# Altium PCB Pressure_Tap_Board.PcbDoc (part 2 of 2)
Units mil, origin at the board's own origin, x right, y up, seen from the top; angles counter-clockwise.
Board outline 8600 x 2865 mil, 2 copper layers (Top Layer, Bottom Layer); 161 components, 82 nets, 571 pads, 255 vias.
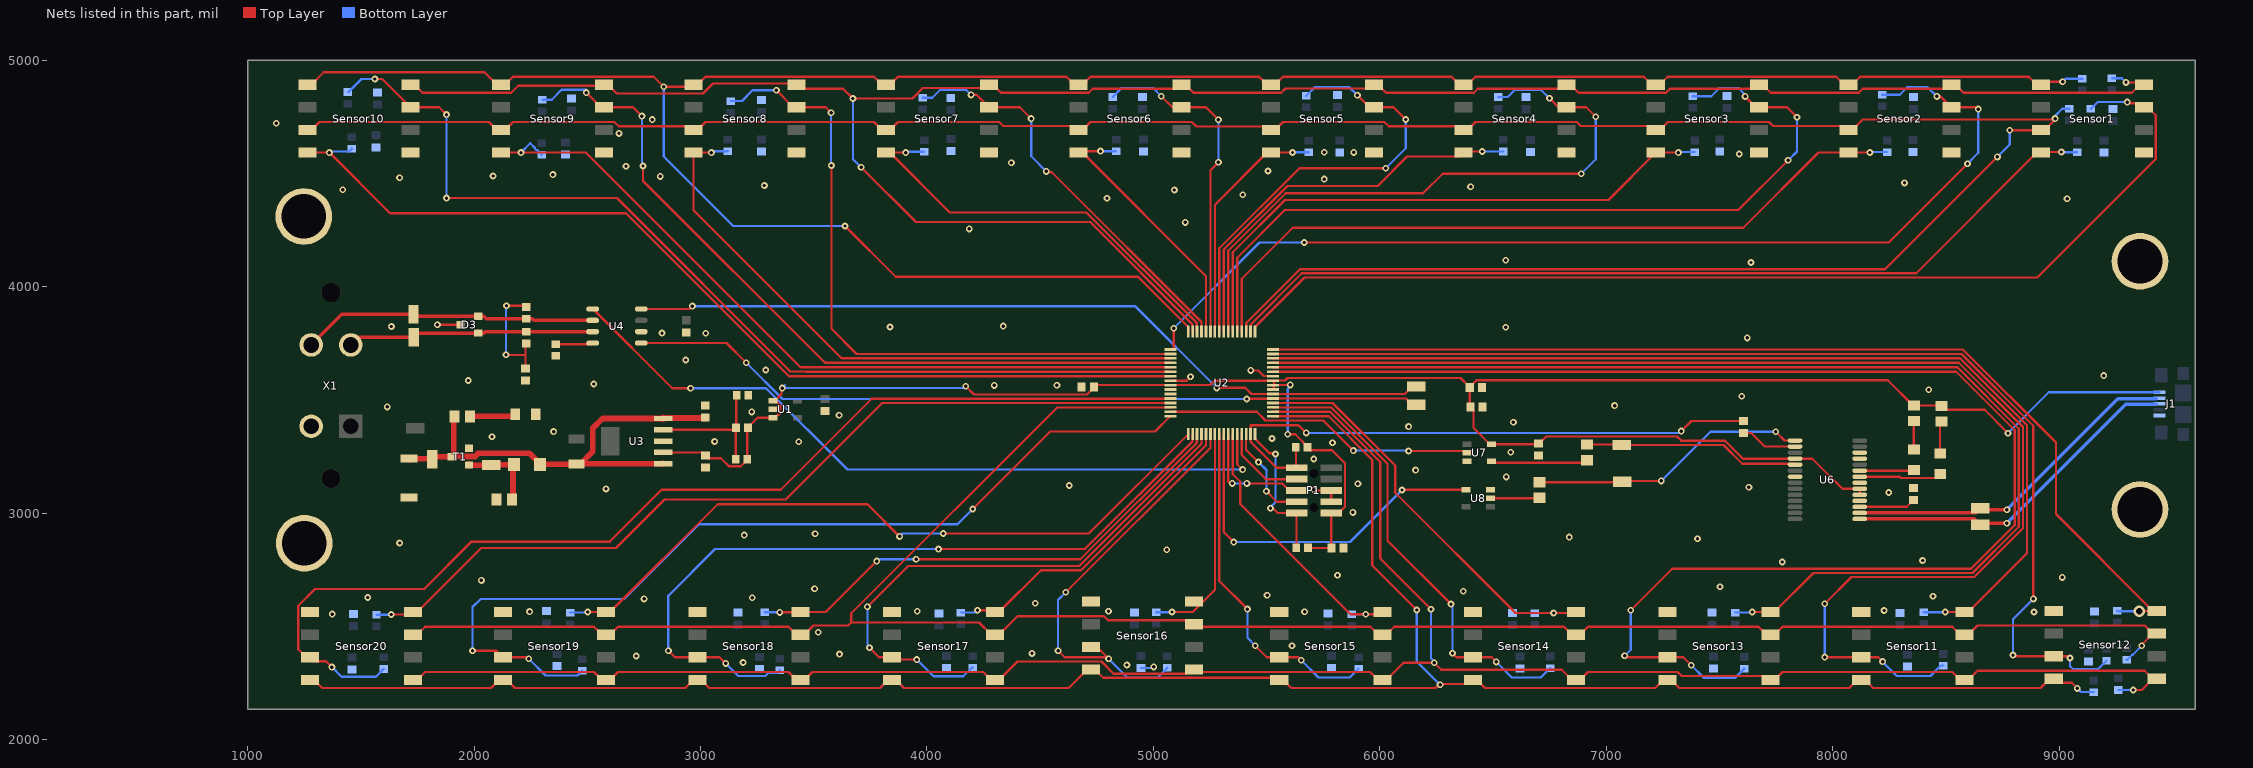
[diagram p2: the nets of this part, all layers, seen from the top]

## Via types
v1: diameter 30, hole 15, Top Layer to Bottom Layer, 254 vias
v2: diameter 50, hole 28, Top Layer to Bottom Layer, 1 vias

## Nets (pads, with @x,y where several pads share a name; then routed paths per layer and width w, separated by ;. In a path a pad name is that pad's centre, name@x,y a point inside that pad or via, vN(x,y) a via of type N, cw(c..) or ccw(c..) an arc to the next point about the centre after c; other vN are vias at no path point) (continued)
ADC1: R9.1 Sensor1.4 U2.18 | length 3997.7
  Top Layer w10: U2.18@5428.95,3802.38 5429.73,3803.16 5429.73,3834.34 5655.24,4059.84 8368.26,4059.84 8901.42,4593 Sensor1.4@8918.92,4593 8921.77,4595.85 v1(9010,4595.85)
  Bottom Layer w10: v1(9010,4595.85) 9011.85,4594 R9.1@9079,4594
ADC2: R42.1 Sensor2.4 U2.20 | length 3315.5
  Top Layer w10: U2.20@5389.58,3802.38 5389.58,4035.58 5615,4261 7605,4261 7937,4593 Sensor2.4@8068.92,4593 8163.57,4593 v1(8164,4593.43)
  Bottom Layer w10: v1(8164,4593.43) 8165.98,4595.41 R42.1@8240,4595.41
ADC3: R44.1 Sensor3.4 U2.22 | length 2574.8
  Top Layer w10: U2.22@5350.21,3802.38 5350.21,4153.21 5581,4384 7009.45,4384 Sensor3.4@7218.45,4593 v1(7318.59,4593)
  Bottom Layer w10: v1(7318.59,4593) 7321,4595.41 R44.1@7391,4595.41
ADC4: R46.1 Sensor4.4 U2.24 | length 1776.1
  Top Layer w10: U2.24@5310.84,3802.38 5310.84,4164.75 5591.93,4445.84 5990.27,4445.84 6119.93,4575.5 6351.42,4575.5 6373.92,4598 v1(6452,4598)
  Bottom Layer w10: v1(6452,4598) 6544.82,4598 R46.1@6545,4597.82
ADC5: R48.1 Sensor5.4 U2.26 | length 1073.9
  Top Layer w10: U2.26@5272.25,3801 5271.47,3801.78 5271.47,4363.05 5501.42,4593 Sensor5.4@5518.92,4593 5519.35,4593.43 v1(5614,4593.43)
  Bottom Layer w10: v1(5614,4593.43) 5615.39,4594.82 R48.1@5687,4594.82
ADC6: R51.1 Sensor6.4 U2.28 | length 1202.9
  Top Layer w10: v1(4766.41,4599.41) 4675.33,4599.41 Sensor6.4@4668.92,4593 4686.42,4593 5232.1,4047.32 U2.28@5232.1,3802.38
  Bottom Layer w10: v1(4766.41,4599.41) R51.1@4835,4599.41
ADC7: R52.1 Sensor7.4 U2.30 | length 1874.9
  Top Layer w10: Sensor7.4@3818.92,4593 Sensor7.4@3836.42,4593 ; v1(3906,4593) Sensor7.4@3836.42,4593 ; U2.30@5192.73,3802.38 5191.95,3803.16 5191.95,3840.11 4703.22,4328.84 4100.58,4328.84 Sensor7.4@3836.42,4593
  Bottom Layer w10: v1(3906,4593) 3909.41,4596.41 R52.1@3987,4596.41
ADC8: R55.1 Sensor8.4 U2.35 | length 2786.2
  Top Layer w10: v1(3048,4593) Sensor8.4@2968.92,4593 2968.92,4338.08 3622.73,3684.27 U2.35@5074.62,3684.27
  Bottom Layer w10: v1(3048,4593) 3054.41,4599.41 R55.1@3121,4599.41
ADC9: R56.1 Sensor9.4 U2.37 | length 3480.1
  Top Layer w10: Sensor9.4@2118.92,4593 v1(2207,4593) 2493,4593 3441.1,3644.9 U2.37@5074.62,3644.9
  Bottom Layer w10: v1(2207,4593) 2248.2,4634.2 2267.3,4615.11 2267.3,4612.47 2274.91,4604.86 2277.55,4604.86 R56.1@2299,4583.41
ADC10: R58.1 Sensor10.4 U2.39 | length 4325.5
  Top Layer w10: Sensor10.4@1263.92,4593 v1(1361,4593) 1629,4325 2671.02,4325 3390.5,3605.53 3437,3605.53 U2.39@5074.62,3605.53
  Bottom Layer w10: v1(1361,4593) 1366.41,4593 1371.09,4597.68 1448.27,4597.68 R58.1@1460,4609.41
ADC11: R20.1 Sensor11.4 U2.14 | length 4583
  Top Layer w10: U2.14@5527.38,3684.27 8562.53,3684.27 8858,3388.79 8858,2823.42 8598.58,2564 v1(8497,2564)
  Bottom Layer w10: R20.1@8401,2563.59 8496.59,2563.59 v1(8497,2564)
ADC12: R12.1 Sensor12.4 U2.16 | length 4725.8
  Top Layer w10: U2.16@5527.38,3723.64 8574.07,3723.64 8985.46,3312.24 8985.46,2997.12 Sensor12.4@9413.58,2569 ; v2(9353,2567.84) 9354.16,2569 Sensor12.4@9413.58,2569 ; Sensor12.4@9431.08,2569 Sensor12.4@9413.58,2569
  Bottom Layer w10: R12.1@9256,2570.59 9258.75,2567.84 v2(9353,2567.84)
ADC13: R25.1 Sensor13.4 U2.12 | length 5249.8
  Top Layer w10: U2.12@5527.38,3644.9 8550.98,3644.9 8822,3373.88 8822,2941.12 8617.72,2736.84 7915.02,2736.84 7742.18,2564 v1(7644.43,2564)
  Bottom Layer w10: R25.1@7569,2561.59 7642.02,2561.59 v1(7644.43,2564)
ADC14: R30.1 Sensor14.4 U2.4 | length 1871.4
  Top Layer w10: U2.4@5527.38,3487.42 5791.38,3487.42 6068,3210.79 6068,3090.57 6598.98,2559.59 Sensor14.4@6861.59,2559.59
  Bottom Layer w10: R30.1@6685,2559.59 v1(6767.41,2559.59)
ADC15: R27.1 Sensor15.4 U2.59 | length 1216.5
  Top Layer w10: U2.59@5350.21,3349.62 5350.21,3172.21 5383,3139.43 5383,3041.59 5870,2554.59 v1(5937.59,2554.59) ; v1@5939.79,2556.79 5941.98,2554.59 6001.59,2554.59 Sensor15.4@6011,2564
  Bottom Layer w10: R27.1@5875,2554.59 v1(5937.59,2554.59)
ADC16: R34.1 Sensor16.4 U2.55 | length 988.3
  Top Layer w10: v1(5082,2564) 5173.5,2564 5271.47,2661.97 U2.55@5271.47,3349.62
  Bottom Layer w10: R34.1@5012,2562.59 5080.59,2562.59 v1(5082,2564)
ADC17: R31.1 Sensor17.4 U2.53 | length 1448.7
  Top Layer w10: v1(4223,2572.35) 4310.15,2572.35 4318.5,2564 4503.5,2749 4679.97,2749 5232.1,3301.13 U2.53@5232.1,3349.62
  Bottom Layer w10: R31.1@4150,2561.59 4220.59,2561.59 4223,2564 v1(4223,2572.35)
ADC18: R38.1 Sensor18.4 U2.51 | length 2257.4
  Top Layer w10: v1(3349.41,2562.59) 3439.59,2562.59 Sensor18.4@3441,2564 3553,2564 v1(3778,2789) ; v1(3952,2797) 4677.06,2797 5191.95,3311.89 5191.95,3348.84 U2.51@5192.73,3349.62
  Bottom Layer w10: R38.1@3283,2562.59 v1(3349.41,2562.59) ; v1(3778,2789) 3786,2797 v1(3952,2797)
ADC19: R35.1 Sensor19.4 U2.49 | length 3172.4
  Top Layer w10: v1(2502,2564) Sensor19.4@2582.57,2564 2600.07,2564 3076.07,3040 3737,3040 v1(3879,2898) ; v1(4072,2911) 4714.74,2911 U2.49@5153.36,3349.62
  Bottom Layer w10: R35.1@2425,2561.59 2499.59,2561.59 v1(2502,2564) ; v1(3879,2898) 3892,2911 v1(4072,2911)
ADC20: R39.1 Sensor20.4 U2.45 | length 3892.8
  Top Layer w10: v1(1634,2553) 1720,2553 Sensor20.4@1731,2564 1748.5,2564 2031.5,2847 2627,2847 2841,3061 3376.58,3061 3803,3487.42 U2.45@5074.62,3487.42
  Bottom Layer w10: R39.1@1569,2552.59 1633.59,2552.59 v1(1634,2553)
CAN_N: D3.2 R16.1 TEST_CANN1.1 U4.6 X1.3 | length 1310.7
  Top Layer w15: X1.3@1280.32,3743.45 1415.87,3879 TEST_CANN1.1@1732,3879 1740.6,3870.4 D3.2@2018.37,3870.4 2043.59,3870.4 2053.99,3860 R16.1@2230,3860 2256.2,3860 2264.2,3852 U4.6@2523.72,3852
CAN_P: D3.1 R17.2 TEST_CANP1.1 U4.7 X1.4 | length 1092.4
  Top Layer w15: X1.4@1455.52,3743.45 1490.07,3778 TEST_CANP1.1@1733,3778 1750.6,3795.6 D3.1@2018.37,3795.6 2043.59,3795.6 2048.99,3801 R17.2@2230,3801 2256.2,3801 2257.2,3802 U4.7@2523.72,3802
Clk1-10: R7.1 Sensor1.1 Sensor2.1 Sensor3.1 Sensor4.1 Sensor5.1 Sensor6.1 Sensor7.1 Sensor8.1 Sensor9.1 Sensor10.1 U2.32 | length 11092.9
  Top Layer w10: Sensor10.1@1263.92,4893 1281.42,4893 1336.42,4948 2046.42,4948 2101.42,4893 2136.42,4893 2171.92,4928.5 2793.5,4928.5 v1(2838,4884) 2959.92,4884 Sensor8.1@2968.92,4893 2986.42,4893 3021.92,4928.5 3765.92,4928.5 3801.42,4893 3836.42,4893 3871.92,4928.5 4615.92,4928.5 4651.42,4893 4686.42,4893 4721.92,4928.5 5465.92,4928.5 5501.42,4893 5536.42,4893 5571.92,4928.5 6315.92,4928.5 6351.42,4893 6386.42,4893 6421.92,4928.5 7165.45,4928.5 7200.95,4893 7235.95,4893 7271.45,4928.5 8015.92,4928.5 8051.42,4893 8086.42,4893 8121.92,4928.5 8865.92,4928.5 8901.42,4893 Sensor1.1@8918.92,4893 8931.92,4906 v1(9015,4906) ; v1(3638,4269) 3862.44,4044.56 4931.85,4044.56 5153.36,3823.05 U2.32@5153.36,3802.38
  Bottom Layer w10: v1(2838,4884) 2838,4576 3145,4269 v1(3638,4269) ; v1(9015,4906) 9027.59,4918.59 R7.1@9102,4918.59
Clk11-20: R10.1 Sensor11.1 Sensor12.1 Sensor13.1 Sensor14.1 Sensor15.1 Sensor16.1 Sensor17.1 Sensor18.1 Sensor19.1 Sensor20.1 U2.2 | length 9714.8
  Top Layer w10: Sensor20.1@1731,2264 1748.5,2264 1784,2299.5 2529.57,2299.5 2565.07,2264 2600.07,2264 2635.57,2299.5 3388,2299.5 3423.5,2264 3458.5,2264 3494,2299.5 4248,2299.5 4283.5,2264 4318.5,2264 4400,2345.5 4770.31,2345.5 4823.96,2291.84 5144.34,2291.84 5162.5,2310 Sensor16.1@5180,2310 ; Sensor16.1@5209,2299.5 5958,2299.5 5993.5,2264 6028.5,2264 6104.5,2340 v1(6240,2340) 6271.16,2308.84 6803.66,2308.84 6848.5,2264 6883.5,2264 6919,2299.5 7314.98,2299.5 7332.98,2281.5 7707.18,2281.5 Sensor13.1@7724.68,2264 7742.18,2264 7777.68,2299.5 8528.08,2299.5 8563.58,2264 8598.58,2264 8639.08,2304.5 9378.08,2304.5 Sensor12.1@9413.58,2269 ; U2.2@5527.38,3448.05 5779.84,3448.05 6001.39,3226.49 6001.39,2800.61 v1(6226,2576) ; v1(9326.82,2219.82) 9364.4,2219.82 Sensor12.1@9413.58,2269 ; Sensor12.1@9431.08,2269 Sensor12.1@9413.58,2269
  Bottom Layer w10: v1(6226,2576) 6226,2359.41 6240,2345.41 v1(6240,2340) ; R10.1@9261,2219.82 v1(9326.82,2219.82)
D_N: J1.2 TEST_USBD_N1.1 U6.16 | length 1524
  Top Layer w15: U6.16@8119,3001.93 8630.93,3001.93 TEST_USBD_N1.1@8651,3022 8657,3016 v1(8769,3016)
  Bottom Layer w15: v1(8769,3016) 9259.62,3506.62 J1.2@9429,3506.62
D_P: J1.3 TEST_USBD_P1.1 U6.15 | length 1540.4
  Top Layer w15: U6.15@8119,2975.31 8625.69,2975.31 TEST_USBD_P1.1@8651,2950 8657,2956 v1(8769,2956)
  Bottom Layer w15: v1(8769,2956) 9294.03,3481.03 J1.3@9429,3481.03
DGND: C1.1 C2.1 C3.1 C5.1 C6.1 C7.1 C8.1 C9.1 C10.1 C11.1 C12.2 C13.1 C14.1 C15.1 C16.1 C18.1 C19.1 C20.1 C21.1 C22.1 C23.1 C24.1 C25.1 C26.1 C27.1 C28.1 C29.1 C30.1 C31.1 C32.1 C33.1 C34.1 C35.1 C36.1 C37.1 C38.1 C39.1 C40.1 C41.1 C42.1 C43.1 C44.1 C45.1 C46.1 C47.1 C48.1 C49.1 C50.1 C51.1 C52.1 C53.1 D2.1 D3.3 J1.5 P1.3 P1.5 pad.4 pad.5 pad.7 pad.8 pad.9 pad.10 POWER1.2 R2.1 R5.1@2098.55,3060 R15.2 Sensor1.5 Sensor2.5 Sensor3.5 Sensor4.5 Sensor5.5 Sensor6.5 Sensor7.5 Sensor8.5 Sensor9.5 Sensor10.5 Sensor11.5 Sensor12.5 Sensor13.5 Sensor14.5 Sensor15.5 Sensor16.5 Sensor17.5 Sensor18.5 Sensor19.5 Sensor20.5 T1.2 U1.2 U2.10 U2.40 U3.3 U4.2 U6.7 U6.18 U6.21 U6.25 U6.26 U7.3 U8.3 X1.2 | length 483.6
  Top Layer w10: v1(1838,3833) D3.3@1939.63,3833 ; U2.40@5074.62,3585.84 5146.84,3585.84 v1(5164,3603) ; v1(5429.73,3631) 5463.11,3631 5487.8,3606.31 U2.10@5517.79,3606.31 ; v1(5707.84,3103.84) 5710.69,3101 P1.5@5785.77,3101 P1.3@5785.77,3051
  Bottom Layer w10: C28.1@4946,2316.43 4996.43,2316.43 v1(5001.84,2321.84)
  other v1: 4882.84,2329.99 3188,2341 2715.84,2369.84 3613.84,2378.39 4463.84,2381.35 5611.84,2414.84 3519.51,2474.84 1374,2555 8889,2564 5667.84,2564.84 2245.06,2565.84 3956.84,2567.84 4801.84,2567.84 8226.84,2570.84 4477.84,2602.51 2750.84,2621.84 3228,2627 1530,2628 8442.84,2633.84 5502.14,2637.71 6368,2656 3503.84,2666.84 7502,2676 2032.34,2703.84 9014,2717 5812.84,2726.84 7776.84,2784.84 8396.84,2791.84 5059,2839 1671,2869 7402.84,2887.84 6836.84,2894.84 3192.84,2903.84 3505.84,2909.84 5880.84,3003.84 8247,3092 2582.57,3108 7629.84,3114.84 4628,3123 5902.84,3130.84 6557.84,3160.84 6157.84,3190.84 5707.84,3239.84 6577.84,3269.84 5790.84,3311.84 3434,3316 3062,3317 5523.84,3330.53 2079,3338 2351,3361 6127,3383 6589.84,3401.84 3612,3433 3225.84,3447.84 1616.84,3469.84 7036.84,3475.84 7597.84,3516.84 8424,3546 4296.84,3564.84 4573.84,3565.84 2528.84,3570.87 1973.84,3586.69 9197,3608 3287.69,3632.84 2934.84,3677.29 7622.84,3774.84 3022.84,3794.84 2829.84,3795.69 6555.84,3821.84 3836.84,3822.84 1634.87,3825 4336.84,3826.84 7638.84,4107.84 6555.84,4117.84 4187,4256 5140.84,4284.84 9035,4389 4794.84,4391.84 5394.84,4406.84 5092.84,4427.84 1419.84,4428.84 6400.84,4441.84 3281.84,4447.55 8317,4459 5754.84,4475.84 1670.84,4481.84 2821.84,4487.84 2083.84,4489.84 2347.84,4495.84 5505.84,4511.84 2670.84,4532.84 4372.84,4547.84 7587,4587 5884.84,4593.84 5754,4594.75 2639.84,4677.84 1125.84,4722.84 2786.84,4738.84
Din1-10: R8.1 Sensor1.3 Sensor2.3 Sensor3.3 Sensor4.3 Sensor5.3 Sensor6.3 Sensor7.3 Sensor8.3 Sensor9.3 Sensor10.3 U2.19 | length 12066.9
  Top Layer w10: Sensor10.3@1263.92,4693 1281.42,4693 1316.92,4728.5 2065.92,4728.5 2101.42,4693 2136.42,4693 2171.92,4728.5 2619.38,4728.5 2639.04,4708.84 2953.08,4708.84 Sensor8.3@2968.92,4693 2986.42,4693 3021.92,4728.5 3765.92,4728.5 3801.42,4693 3836.42,4693 3871.92,4728.5 4319.38,4728.5 4337.38,4710.5 4651.42,4710.5 Sensor6.3@4668.92,4693 4686.42,4693 4721.92,4728.5 5169.38,4728.5 5189.88,4708 5503.92,4708 Sensor5.3@5518.92,4693 5536.42,4693 5571.92,4728.5 6019.38,4728.5 6038.88,4709 6352.92,4709 Sensor4.3@6368.92,4693 6386.42,4693 6421.92,4728.5 6869.38,4728.5 6887.38,4710.5 7200.95,4710.5 Sensor3.3@7218.45,4693 7235.95,4693 7271.45,4728.5 7718.91,4728.5 7736.91,4710.5 8051.42,4710.5 Sensor2.3@8068.92,4693 8086.42,4693 8132.42,4739 8964.92,4739 ; U2.19@5409.27,3802.38 5410.05,3803.16 5410.05,3840.11 5647.78,4077.84 8230.84,4077.84 v1(8727,4574) ; v1(8782,4692) 8917.92,4692 Sensor1.3@8918.92,4693 8936.42,4693 8982,4738.58 v1(8982,4743)
  Bottom Layer w10: v1(8727,4574) 8782,4629 v1(8782,4692) ; v1(8982,4743) 8982,4755 9013.59,4786.59 R8.1@9045,4786.59
Din11-20: R11.1 Sensor11.3 Sensor12.3 Sensor13.3 Sensor14.3 Sensor15.3 Sensor16.3 Sensor17.3 Sensor18.3 Sensor19.3 Sensor20.3 U2.46 | length 9999.7
  Top Layer w10: Sensor20.3@1731,2464 1748.5,2464 1784,2499.5 2529.57,2499.5 2565.07,2464 2600.07,2464 2635.57,2499.5 3388,2499.5 3423.5,2464 3458.5,2464 3499.34,2504.84 3652.84,2504.84 3666,2518 ; U2.46@5074.62,3467.73 4575.31,3467.73 3666,2558.43 3666,2518 ; v1(9365,2415) 9368.83,2418.83 9368.83,2424.25 Sensor12.3@9413.58,2469 ; 3666,2518 4229.5,2518 4283.5,2464 4318.5,2464 4400,2545.5 4781.76,2545.5 4799.26,2528 4825.46,2528 4825.96,2527.5 5181,2527.5 5209,2499.5 5958,2499.5 5993.5,2464 6028.5,2464 6064,2499.5 6813,2499.5 6848.5,2464 6883.5,2464 6919,2499.5 7671.68,2499.5 7707.18,2464 7742.18,2464 7777.68,2499.5 8528.08,2499.5 8563.58,2464 8598.58,2464 8639.08,2504.5 9378.08,2504.5 Sensor12.3@9413.58,2469 ; Sensor12.3@9413.58,2469 Sensor12.3@9431.08,2469 Sensor12.3@9413.58,2469
  Bottom Layer w10: R11.1@9299,2353.41 9300.97,2353.41 9322.42,2374.86 9324.86,2374.86 v1(9365,2415)
Dout1-10: R6.1 Sensor1.8 Sensor2.8 Sensor3.8 Sensor4.8 Sensor5.8 Sensor6.8 Sensor7.8 Sensor8.8 Sensor9.8 Sensor10.8 U2.31 | length 10202.5
  Top Layer w10: Sensor10.8@1719,4893 1736.5,4893 1772,4857.5 2164.31,4857.5 2194.81,4888 2569,4888 Sensor9.8@2574,4893 2591.5,4893 2630.5,4854 3010.81,4854 3054.81,4898 3419,4898 3441.5,4875.5 3629.5,4875.5 v1(3673,4832) 3935.71,4832 3981.71,4878 4259,4878 Sensor7.8@4274,4893 4291.5,4893 4327,4857.5 4714.31,4857.5 4732.31,4875.5 5106.5,4875.5 Sensor6.8@5124,4893 5141.5,4893 5177,4857.5 5564.31,4857.5 5582.81,4876 5957,4876 Sensor5.8@5974,4893 5991.5,4893 6027,4857.5 6414.31,4857.5 6432.31,4875.5 6806.5,4875.5 Sensor4.8@6824,4893 6841.5,4893 6877,4857.5 7263.83,4857.5 7281.83,4875.5 7656.03,4875.5 Sensor3.8@7673.53,4893 7691.03,4893 7726.53,4857.5 8114.31,4857.5 8132.31,4875.5 8506.5,4875.5 Sensor2.8@8524,4893 8541.5,4893 8577,4857.5 9321,4857.5 9356.5,4893 Sensor1.8@9374,4893 9364,4903 v1(9295,4903) ; v1(3709,4528) 3951,4286 4720.61,4286 5172.27,3834.34 5172.27,3803.16 U2.31@5173.05,3802.38
  Bottom Layer w10: v1(3673,4832) 3673,4564 v1(3709,4528) ; R6.1@9233,4921.59 9276.41,4921.59 v1(9295,4903)
Dout11-20: R13.1 Sensor11.8 Sensor12.8 Sensor13.8 Sensor14.8 Sensor15.8 Sensor16.8 Sensor17.8 Sensor18.8 Sensor19.8 Sensor20.8 U2.1 | length 9812.6
  Top Layer w10: Sensor20.8@1275.92,2264 1293.42,2264 1328.92,2228.5 2074.5,2228.5 2110,2264 2145,2264 2180.5,2228.5 2932.92,2228.5 2968.42,2264 3003.42,2264 3038.92,2228.5 3792.92,2228.5 3828.42,2264 3863.42,2264 3898.92,2228.5 4625.92,2228.5 4707.42,2310 4742.42,2310 4778.58,2273.84 5546.08,2273.84 Sensor15.8@5555.92,2264 5573.42,2264 5608.92,2228.5 6246.09,2228.5 6260.59,2243 v1(6266,2243) 6269.5,2246.5 6393.42,2246.5 Sensor14.8@6410.92,2264 6428.42,2264 6463.92,2228.5 7216.6,2228.5 7252.1,2264 7287.1,2264 7322.6,2228.5 8073,2228.5 8108.5,2264 8143.5,2264 8179,2228.5 8918,2228.5 8958.5,2269 Sensor12.8@8976,2269 8993.5,2251.5 9055.5,2251.5 v1(9080,2227) ; U2.1@5527.38,3428.36 5774.06,3428.36 5966.62,3235.81 5966.62,2769.38 v1(6163,2573)
  Bottom Layer w10: v1(6163,2573) 6163,2346 v1(6266,2243) ; v1(9080,2227) 9096.59,2210.41 R13.1@9153,2210.41
DVCC_5V: C2.2 C4.2 C5.2 C6.2 C18.2 C23.2 C24.2 J1.1 P1.1 R1.2 R4.2@5682.59,2847 R5.2@5680.59,3292 R23.2 R24.2 U1.1 U1.3 U2.7 U2.8 U2.9 U2.41 U3.2 U6.4 U6.19 U6.20 U7.5 | length 10451
  Top Layer w10: U3.2@2835.13,3269 2835.26,3268.87 3009.28,3268.87 3034.72,3243.43 3089.04,3243.43 3125.17,3207.3 3177.53,3207.3 3194.86,3224.63 3194.86,3227.27 R1.2@3206.59,3239 3206.59,3374.02 C4.2@3210.57,3378 3210.57,3379.97 3253.2,3422.6 3327.74,3422.6 3340.33,3435.19 3344.94,3435.19 3352.55,3442.8 3352.55,3477.2 3339.16,3490.59 3326.68,3490.59 U1.1@3319.87,3497.4 3327.74,3497.4 3357.17,3526.83 3357.17,3549.17 v1(3361,3553) ; v1(4171,3561) 4207.69,3524.32 4706.53,3524.32 4714.14,3531.93 4714.14,3532.6 4736.57,3555.03 C23.2@4736.57,3557 4745.73,3566.16 5249.73,3566.16 5269.42,3585.84 U2.9@5527.38,3585.84 ; U2.7@5527.38,3546.47 U2.8@5533.77,3563.8 ; U2.8@5527.38,3566.16 5603.16,3566.16 v1(5604,3567) ; U2.8@5534.77,3569.5 U2.9@5527.38,3585.84 ; v1(5592.84,3348.84) 5626.38,3348.84 5659.14,3316.09 5659.14,3315.42 5680.59,3293.97 R5.2@5680.59,3292 5680.59,3290.03 5692.32,3278.3 5789.06,3278.3 5846.02,3221.35 5846.02,3028.96 5818.06,3001 P1.1@5785.77,3001 C6.2@5785.77,2846.23 5785,2847 R4.2@5682.59,2847 ; U6.19@8119,3081.77 U6.20@8119,3108.39 8042.82,3108.39 7909.75,3241.46 7603.21,3241.46 7524.67,3320 7331.57,3320 7311.94,3339.64 6735.03,3339.64 6702.97,3307.57 C18.2@6701,3307.57 6698.9,3305.47 6485.76,3305.47 6413.57,3377.67 6413.57,3457.28 6397,3473.85 C24.2@6397,3556.97 ; v1(8774,3354) 8671.19,3456.81 8497.64,3456.81 8478,3476.45 8354.06,3476.45 8242.83,3587.68 6427.05,3587.68 6419.43,3580.07 6419.43,3579.4 C24.2@6397,3556.97 ; U2.9@5527.38,3585.84 5527.69,3586.16 5580.73,3586.16 5592.21,3597.64 6356.33,3597.64 C24.2@6397,3556.97
  Bottom Layer w10: 3373,3565 v1(3361,3553) 4163,3553 v1(4171,3561) ; v1(5592.84,3348.84) 5592.84,3550.43 5604,3561.59 v1(5604,3567) ; v1(8774,3354) 8954.43,3534.43 J1.1@9442.68,3534.43
EE1: R3.1 Sensor1.7 U2.17 | length 4823.4
  Top Layer w10: U2.17@5448.64,3802.38 5448.64,3823.05 5667.43,4041.84 8903.73,4041.84 9427,4565.12 9427,4757.5 9391.5,4793 Sensor1.7@9374,4793 9356.5,4810.5 9311.91,4810.5 9306.41,4816 v1(9301,4816)
  Bottom Layer w10: R3.1@9139,4786.59 9140.97,4786.59 9170.67,4816.29 9300.71,4816.29 v1(9301,4816)
EE2: R41.1 Sensor2.7 U2.33 | length 4654.2
  Top Layer w10: U2.33@5074.62,3723.64 5089.09,3723.64 5090,3724.54 v1(5090,3817) ; v1(5666,4196) 8247,4196 v1(8595,4544) ; v1(8460,4841) 8476,4841 Sensor2.7@8524,4793 8635,4793 v1(8643,4785)
  Bottom Layer w10: v1(5090,3817) 5469,4196 v1(5666,4196) ; R41.1@8218,4848.59 8295.59,4848.59 8329,4882 8419,4882 v1(8460,4841) ; v1(8595,4544) 8643,4592 v1(8643,4785)
EE3: R43.1 Sensor3.7 U2.21 | length 3677.3
  Top Layer w10: U2.21@5369.9,3802.38 5369.9,4128.9 5580,4339 7583,4339 v1(7803,4559) ; v1(7613,4841) 7661,4793 Sensor3.7@7673.53,4793 7798,4793 v1(7842,4749)
  Bottom Layer w10: R43.1@7381,4841.59 7463.59,4841.59 7499,4877 7585,4877 7613,4849 v1(7613,4841) ; v1(7803,4559) 7842,4598 v1(7842,4749)
EE4: R45.1 Sensor4.7 U2.23 | length 2828
  Top Layer w10: U2.23@5330.53,3802.38 5330.53,4158.98 5584.54,4413 6190.57,4413 6277.57,4500 v1(6889,4500) ; v1(6749,4833) 6789,4793 Sensor4.7@6824,4793 6911,4793 v1(6953,4751)
  Bottom Layer w10: R45.1@6522,4838.59 6564.59,4838.59 6597,4871 6711,4871 v1(6749,4833) ; v1(6889,4500) 6953,4564 v1(6953,4751)
EE5: R47.1 Sensor5.7 U2.25 | length 2014.2
  Top Layer w10: U2.25@5291.16,3802.38 5291.16,4170.52 5644.63,4524 v1(6026,4524) ; v1(5901,4846) 5954,4793 Sensor5.7@5974,4793 6060,4793 v1(6114,4739)
  Bottom Layer w10: R47.1@5675,4843.59 5712.41,4881 5866,4881 v1(5901,4846) ; v1(6026,4524) 6114,4612 v1(6114,4739)
EE6: R49.1 Sensor6.7 U2.27 | length 1496.5
  Top Layer w10: v1(5035,4842) 5084,4793 Sensor6.7@5124,4793 5232,4793 v1(5287,4738) ; U2.27@5251.79,3802.38 5251.79,4514.79 v1(5287,4550)
  Bottom Layer w10: R49.1@4820,4838.59 4859.41,4878 4999,4878 v1(5035,4842) ; v1@5287,4545 v1(5287,4550) v1(5287,4738)
EE7: R50.1 Sensor7.7 U2.29 | length 1811
  Top Layer w10: v1(4195,4848) 4219,4848 Sensor7.7@4274,4793 4410,4793 v1(4460,4743) ; v1(4527,4510) 4530.83,4506.17 4551.34,4506.17 5212.42,3845.1 U2.29@5212.42,3802.38
  Bottom Layer w10: R50.1@3981,4835.59 4023.59,4835.59 4059,4871 4172,4871 v1(4195,4848) ; v1(4460,4743) 4460,4577 v1(4527,4510)
EE8: R53.1 Sensor8.7 U2.34 | length 3000.7
  Top Layer w10: v1(3335,4868) 3410,4793 Sensor8.7@3424,4793 3553,4793 v1(3576.59,4769.41) ; v1(3578,4536) 3578,3815 3689.05,3703.95 U2.34@5074.62,3703.95
  Bottom Layer w10: R53.1@3134,4820.59 3182.59,4820.59 3230,4868 v1(3335,4868) ; v1(3576.59,4769.41) 3576.59,4537.41 v1(3578,4536)
EE9: R54.1 Sensor9.7 U2.36 | length 3461.5
  Top Layer w10: v1(2495,4858) 2560,4793 Sensor9.7@2574,4793 2702,4793 v1(2741,4754) ; v1(2746,4534) 2746,4468 3549.42,3664.58 U2.36@5074.62,3664.58
  Bottom Layer w10: R54.1@2302,4826.59 2342.59,4826.59 2386,4870 2495,4870 v1(2495,4858) ; v1(2741,4754) 2741,4539 v1(2746,4534)
EE10: R57.1 Sensor10.7 U2.38 | length 4406.4
  Top Layer w10: v1(1562,4918) 1594,4918 Sensor10.7@1719,4793 1846,4793 v1(1878,4761) ; v1(1878,4392) 2631,4392 3396.22,3626.78 3466,3626.78 ; 3466,3625.21 U2.38@5074.62,3625.21
  Bottom Layer w10: R57.1@1443,4860.59 1444.97,4860.59 1502.38,4918 v1(1562,4918) ; v1(1878,4392) v1(1878,4761)
EE11: R19.1 Sensor11.7 U2.13 | length 5703.6
  Top Layer w10: U2.13@5527.38,3664.58 8556.76,3664.58 8840,3381.34 8840,2933.66 8625.18,2718.84 8082.84,2718.84 v1(7965,2601) ; v1(7965,2365) 7966,2364 Sensor11.7@8126,2364 8201,2364 v1(8220,2345)
  Bottom Layer w10: v1(7965,2365) v1(7965,2601) ; v1(8220,2345) 8283,2282 8432,2282 8477.41,2327.41 R19.1@8489,2327.41
EE12: R14.1 Sensor12.7 U2.15 | length 5016.6
  Top Layer w10: U2.15@5527.38,3703.95 8568.3,3703.95 8886,3386.25 v1(8886,2622) ; v1(8796,2374) 8801,2369 Sensor12.7@8976,2369 9042,2369 9048,2363 v1(9048,2361)
  Bottom Layer w10: v1(8796,2374) 8796,2532 v1(8886,2622) ; v1(9048,2361) 9048,2325 9062,2311 9171.59,2311 R14.1@9209,2348.41
EE13: R26.1 Sensor13.7 U2.11 | length 6452.6
  Top Layer w10: U2.11@5527.38,3625.21 8545.21,3625.21 8804,3366.43 8804,2948.57 8610.27,2754.84 7290.84,2754.84 v1(7108,2572) ; v1(7081,2371) 7088,2364 Sensor13.7@7269.6,2364 7340,2364 v1(7375,2329)
  Bottom Layer w10: v1(7081,2371) 7108,2398 v1(7108,2572) ; v1(7375,2329) 7431,2273 7568.59,2273 R26.1@7610,2314.41
EE14: R29.1 Sensor14.7 U2.3 | length 2058.2
  Top Layer w10: U2.3@5527.38,3467.73 5785.61,3467.73 6034,3219.34 6034,2879 v1(6314,2599) ; v1(6321,2382) 6339,2364 Sensor14.7@6410.92,2364 6494,2364 v1(6514,2344)
  Bottom Layer w10: v1(6314,2599) 6321,2592 v1(6321,2382) ; v1(6514,2344) 6583,2275 6710.59,2275 R29.1@6752,2316.41
EE15: R28.1 Sensor15.7 U2.56 | length 1530.3
  Top Layer w10: U2.56@5291.16,3349.62 5291.16,2700.84 v1(5415,2577) ; v1(5450,2415) 5501,2364 Sensor15.7@5555.92,2364 5640,2364 v1(5653,2351)
  Bottom Layer w10: v1(5415,2577) 5415,2450 v1(5450,2415) ; v1(5653,2351) 5729,2275 5867.59,2275 R28.1@5906,2313.41
EE16: R33.1 Sensor16.7 U2.54 | length 1874.7
  Top Layer w10: v1(4579,2393) 4608,2364 v1@4796,2364 ; v1(4613,2651) 5251.79,3289.79 U2.54@5251.79,3349.62 ; Sensor16.7@4724.92,2410 4750,2410 v1@4796,2364 ; v1(4802,2358) v1@4796,2364
  Bottom Layer w10: v1(4579,2393) 4579,2617 v1(4613,2651) ; v1(4802,2358) 4886,2274 5017.59,2274 R33.1@5061,2317.41
EE17: R32.1 Sensor17.7 U2.52 | length 2524.7
  Top Layer w10: v1(3737,2587) 3917,2767 4672.52,2767 5212.42,3306.9 U2.52@5212.42,3349.62 ; v1(3746,2406) 3788,2364 Sensor17.7@3845.92,2364 3855.92,2354 v1(3955,2354)
  Bottom Layer w10: v1(3737,2587) 3737,2415 v1(3746,2406) ; v1(3955,2354) 4029,2280 4160,2280 4197.41,2317.41 R32.1@4202,2317.41
EE18: R37.1 Sensor18.7 U2.50 | length 3420.6
  Top Layer w10: v1(2858,2393) 2887,2364 Sensor18.7@2985.92,2364 3084,2364 v1(3111,2337) ; v1(4051,2842) 4696.61,2842 5172.27,3317.66 5172.27,3348.84 U2.50@5173.05,3349.62
  Bottom Layer w10: v1(2858,2393) 2858,2636 3064,2842 v1(4051,2842) ; v1(3111,2337) 3166.29,2281.71 3286.07,2281.71 3300.04,2295.68 3338.27,2295.68 R37.1@3350,2307.41
EE19: R36.1 Sensor19.7 U2.48 | length 4161.1
  Top Layer w10: v1(1993,2393) 2098.5,2393 Sensor19.7@2127.5,2364 2235,2364 v1(2241,2358) ; v1(4202,3019) 4544,3361 5007.26,3361 U2.48@5074.62,3428.36
  Bottom Layer w10: v1(1993,2393) 1993,2586 2029,2622 2663,2622 2993,2952 4135,2952 v1(4202,3019) ; v1(2241,2358) 2315,2284 2456.59,2284 R36.1@2477,2304.41
EE20: R40.1 Sensor20.7 U2.44 | length 4866.3
  Top Layer w10: v1(1372,2321) 1346.5,2346.5 1293.42,2346.5 Sensor20.7@1275.92,2364 1258.42,2364 1222.92,2399.5 1222.92,2591.88 1297.04,2666 1780,2666 1989,2875 2598.6,2875 2828,3104.4 3354.4,3104.4 3756.31,3506.31 5042.65,3506.31 5073.84,3506.32 U2.44@5074.62,3507.1
  Bottom Layer w10: v1(1372,2321) 1414.29,2278.71 1566.33,2278.71 1600.03,2312.41 R40.1@1602,2312.41
FTDI_GREEN: D4.2 U6.23 | length 241
  Top Layer w10: U6.23@8119,3188.23 8356.5,3188.23 D4.2@8359,3190.72
FTDI_RED: D5.2 U6.22 | length 364.6
  Top Layer w10: U6.22@8119,3161.61 8295.56,3161.61 8301.11,3156.07 8452.41,3156.07 8470.06,3173.72 D5.2@8474,3173.72
FTDI_RX: R22.2 U7.4 | length 432.8
  Top Layer w10: U7.4@6493.63,3230.67 6493.63,3223.71 6904.16,3223.71 R22.2@6915,3234.55
FTDI_UART_TX: R21.2 U8.2 | length 217.5
  Top Layer w10: U8.2@6488.13,3067 6703.45,3067 R21.2@6705,3068.55
JTAG_RST: C17.2 P1.10 R5.1@5629.41,3292 U2.63 | length 2629.4
  Top Layer w10: R5.1@5629.41,3292 5629.41,3203.82 P1.10@5632.23,3201 5543.43,3201 5429.73,3314.7 5429.73,3348.84 U2.63@5428.95,3349.62 5429.73,3350.4 5429.73,3389.2 5640.8,3389.2 v1(5675,3355) ; v1(7331,3363) 7376.15,3408.15 C17.2@7606,3408.15
  Bottom Layer w10: v1(5675,3355) 7323,3355 v1(7331,3363)
JTAG_TCLK: P1.4 U2.62 | length 442.1
  Top Layer w10: U2.62@5409.27,3349.62 5409.27,3280.73 v1(5464,3226) ; v1(5499,3097) 5545,3051 P1.4@5632.23,3051
  Bottom Layer w10: v1(5464,3226) 5499,3191 v1(5499,3097)
JTAG_TDI: P1.8 U2.61 | length 378.6
  Top Layer w10: U2.61@5389.58,3349.62 5389.58,3257.99 5496.57,3151 P1.8@5632.23,3151
JTAG_TDO: P1.6 U2.58 | length 527.8
  Top Layer w10: U2.58@5330.53,3349.62 5330.53,3139.47 5338,3132 v1(5348,3132) ; v1(5413,3132) 5568.94,3132 5599.94,3101 P1.6@5632.23,3101
  Bottom Layer w10: v1(5348,3132) v1(5413,3132)
JTAG_TMS: P1.2 R4.1@5631.41,2847 U2.64 | length 666.1
  Top Layer w10: U2.64@5448.64,3349.62 5448.64,3328.95 5511.76,3265.83 5535.17,3265.83 v1(5539,3262) ; v1(5517,3022) 5527.82,3022 5548.82,3001 P1.2@5632.23,3001 5632.23,2847.82 R4.1@5631.41,2847
  Bottom Layer w10: v1(5517,3022) 5517,3027.41 5539,3049.41 v1(5539,3262)
LoopBack: U2.60 U4.5 | length 3330.6
  Top Layer w10: U4.5@2523.72,3902 2525.54,3902 2875.54,3552 v1(2956,3552) ; U2.60@5369.9,3349.62 5369.9,3217.1 v1(5394,3193)
  Bottom Layer w10: v1(2956,3552) 3289.54,3552 3648.54,3193 v1(5394,3193)
MCU_RX: U2.57 U8.4 | length 1615.6
  Top Layer w10: U2.57@5310.84,3349.62 5310.84,2917.16 v1(5355,2873) ; v1(6098,3103) 6099.4,3104.4 U8.4@6379.87,3104.4
  Bottom Layer w10: v1(5355,2873) 5868,2873 v1(6098,3103)
MCU_TX: U2.47 U7.2 | length 1386
  Top Layer w10: U2.47@5074.62,3448.05 5456.83,3448.05 5495.42,3409.46 5559.34,3409.46 5560.24,3410.36 5749.64,3410.36 v1(5883,3277) ; v1(6127,3275) 6378.44,3275 U7.2@6385.37,3268.07
  Bottom Layer w10: v1(5883,3277) 6125,3277 v1(6127,3275)
NetC4_1: C4.1 R1.1 R2.2 U3.4 | length 607.2
  Top Layer w10: U3.4@2835.13,3369 3148.43,3369 C4.1@3155.41,3375.98 ; R1.1@3155.41,3239 C4.1@3155.41,3375.98 ; R2.2@3160.41,3521 3157.43,3518.02 C4.1@3157.43,3378 C4.1@3155.41,3375.98
NetC11_2: C11.2 R16.2 R17.1 | length 507.1
  Top Layer w10: v1(2141,3700) 2140,3699 2227,3699 ; v1(2143,3917) 2224.18,3917 R16.2@2230,3911.18 ; C11.2@2227,3639.57 2227,3699 ; R17.1@2230,3749.82 2227,3746.82 2227,3699
  Bottom Layer w10: v1(2141,3700) 2141,3915 v1(2143,3917)
NetC17_1: C17.1 U6.2 | length 257.9
  Top Layer w10: C17.1@7606,3355 7639.69,3355 7700,3294.68 U6.2@7833.57,3294.68 U6.2@7829.8,3298.46
NetD1_1: D1.1 OVP_G1.1 R5.2@2167.45,3060 T1.1 | length 363.2
  Top Layer w10: OVP_G1.1@2075.6,3212.6 OVP_G1.1@2076,3213 ; R5.2@2167.45,3060 R5.2@2175.93,3068.48 ; D1.1@2172.93,3213 D1.1@2175.93,3216
  Top Layer w25: T1.1@1978.57,3212.8 OVP_G1.1@2075.4,3212.8 ; OVP_G1.1@2077.5,3214.5 D1.1@2171.43,3214.5 ; R5.2@2171.69,3071.57 D1.1@2171.69,3211.76
  Top Layer w30: T1.1@1978.37,3212.6 T1.1@1978.57,3212.8 ; OVP_G1.1@2075.4,3212.8 OVP_G1.1@2075.6,3212.6 ; OVP_G1.1@2076,3213 OVP_G1.1@2077.5,3214.5 ; D1.1@2171.43,3214.5 D1.1@2172.93,3213 ; R5.2@2171.69,3071.57 2174.78,3068.48 R5.2@2175.09,3068.48 ; D1.1@2171.69,3211.76 D1.1@2175.93,3216
NetD4_1: D4.1 R23.1 | length 126.7
  Top Layer w10: R23.1@8358,3407.55 8358,3282.28 D4.1@8359,3281.28
NetD5_1: D5.1 R24.1 | length 143.8
  Top Layer w10: D5.1@8474,3264.28 8474,3399.55 R24.1@8480,3405.55
NetPOWER1_1: POWER1.1 R4.1@1982.45,3428 | length 203
  Top Layer w10: POWER1.1@2172.72,3428 POWER1.1@2181.72,3437
  Top Layer w25: R4.1@1982.45,3428 POWER1.1@2172.72,3428
NetR21_1: R21.1 U6.1 UART_TX1.1 | length 1236.8
  Top Layer w10: R21.1@6705,3137.45 7071,3137.45 7076.55,3143 v1(7243,3143) ; v1(7748,3360) 7786.7,3321.3 U6.1@7833.57,3321.3
  Bottom Layer w10: v1(7243,3143) 7460,3360 v1(7748,3360)
NetR22_1: R22.1 U6.5 UART_RX1.1 | length 955.3
  Top Layer w10: R22.1@6915,3303.45 7066.55,3303.45 UART_RX1.1@7068,3302 7517.21,3302 7600.6,3218.61 7829.8,3218.61 U6.5@7833.57,3214.84
NetTEST_CANRX1_1: TEST_CANRX1.1 U2.6 U4.4 | length 3587.3
  Top Layer w10: U4.4@2738.28,3902 2951,3902 v1(2964,3915) ; v1(5280,3554) 5405.43,3554 5432.64,3526.79 5515.45,3526.79 U2.6@5516.23,3527.57 ; U2.6@5527.38,3526.79 6110.07,3526.79 6132.28,3549 TEST_CANRX1.1@6161,3549
  Bottom Layer w10: v1(2964,3915) 4919,3915 v1(5280,3554)
NetTEST_CANTX1_1: TEST_CANTX1.1 U2.5 U4.1 | length 3530.8
  Top Layer w10: U4.1@2738.28,3752 3115,3752 v1(3202,3665) ; v1(5412,3505) 5413.32,3506.32 5526.6,3506.32 U2.5@5527.38,3507.1 6115.18,3507.1 6134.28,3488 TEST_CANTX1.1@6158,3488
  Bottom Layer w10: v1(3202,3665) 3362,3505 v1(5412,3505)
NetU2_42: U2.42
NetU2_43: U2.43
"Power In": C1.2 D1.2 D2.2 F1.1 PWR_OUT1.1 R4.2@1913.55,3428 T1.3 U3.1 U3.5 | length 2038
  Top Layer w10: D2.2@1712,3241.63 D2.2@1714.63,3239 ; PWR_OUT1.1@1815,3239 PWR_OUT1.1@1826,3250 ; T1.3@1901.4,3251.77 T1.3@1910.38,3260.75 ; R4.2@1910.38,3424.83 R4.2@1913.55,3428 ; D1.2@2292.07,3216 D1.2@2292.07,3217.97 ; F1.1@2451.12,3216 F1.1@2453,3217.88 F1.1@2468.75,3217.88 ; C1.2@3017.57,3419 C1.2@3021,3422.43
  Top Layer w25: D2.2@1715.94,3240.32 PWR_OUT1.1@1813.68,3240.32 ; PWR_OUT1.1@1826,3250 T1.3@1899.63,3250 ; T1.3@1901.4,3251.77 1951.55,3251.77 1952.16,3251.15 2004.58,3251.15 2016.59,3263.16 2016.59,3265.04 2245,3265.04 D1.2@2292.07,3217.97 ; T1.3@1910.38,3260.75 R4.2@1910.38,3424.83 ; D1.2@2293.01,3216.94 F1.1@2450.18,3216.94 ; F1.1@2468.75,3217.88 F1.1@2469.31,3218.44 ; U3.1@2834.57,3218.44 F1.1@2469.31,3218.44 ; U3.5@2835.13,3419 2567.55,3419 2524.2,3375.65 2524.2,3273.34 F1.1@2469.31,3218.44 ; U3.5@2836.84,3420.71 C1.2@3016.57,3420.71
  Top Layer w30: D2.2@1714.63,3239 D2.2@1715.94,3240.32 ; PWR_OUT1.1@1813.68,3240.32 PWR_OUT1.1@1815,3239 ; D1.2@2292.07,3216 D1.2@2293.01,3216.94 ; F1.1@2450.18,3216.94 F1.1@2451.12,3216 ; F1.1@2468.75,3219 F1.1@2469.31,3218.44 ; U3.1@2834.57,3218.44 U3.1@2835.13,3219 ; U3.5@2835.13,3419 U3.5@2836.84,3420.71 ; C1.2@3016.57,3420.71 C1.2@3017.57,3419.71
RS: R15.1 U4.8 | length 166
  Top Layer w10: R15.1@2360,3746.59 2518.31,3746.59 U4.8@2523.72,3752
VCC_3V3: C19.2 U6.17 | length 250.4
  Top Layer w10: U6.17@8119,3028.54 8327.12,3028.54 C19.2@8357,3058.43
pads on no net: J1.4 J1.6 J1.7 J1.8 J1.9 J1.10 J1.11 P1.7 P1.9 P1.MH1 P1.MH2 Sensor1.2 Sensor2.2 Sensor3.2 Sensor4.2 Sensor5.2 Sensor6.2 Sensor7.2 Sensor8.2 Sensor9.2 Sensor10.2 Sensor11.2 Sensor12.2 Sensor13.2 Sensor14.2 Sensor15.2 Sensor16.2 Sensor17.2 Sensor18.2 Sensor19.2 Sensor20.2 U1.4 U3. U6.3 U6.6 U6.8 U6.9 U6.10 U6.11 U6.12 U6.13 U6.14 U6.24 U6.27 U6.28 U7.1 U8.1 X1.None

## Polygon pours and split planes (outlines as drawn)
DGND on Bottom Layer "Bottom Layer-DGND" (solid, pour order 28): 1010,4985 1010,1010 9590,1010 9590,4990
DGND on Top Layer "Top Layer-DGND" (solid, pour order 26): 1010,4985 1010,1010 9590,1010 9590,4990

## Keep-outs
Keep-Out Layer:
  lines w5: 1000,2136 1000,5000 9600,5000 9600,2137 1000,2137

## Silkscreen, mask and mechanical layers (free items; w line width, h text height)
Top Overlay:
  text "Design and Layout By" at 7954,3938 h60
  text "Eric Tse" at 7954,3819 h60
  text "a" at 5972,2564 h1500

## Text inside footprints (layer, text, board x,y; h text height)
D4: Top Overlay "*" at 8379,3176 h60 r270
D5: Top Overlay "*" at 8494,3159 h60 r270
POWER1: Top Overlay "*" at 2287,3457 h60